# EAGLE board BMS (EAGLE 7.5.0), part 1 of 2
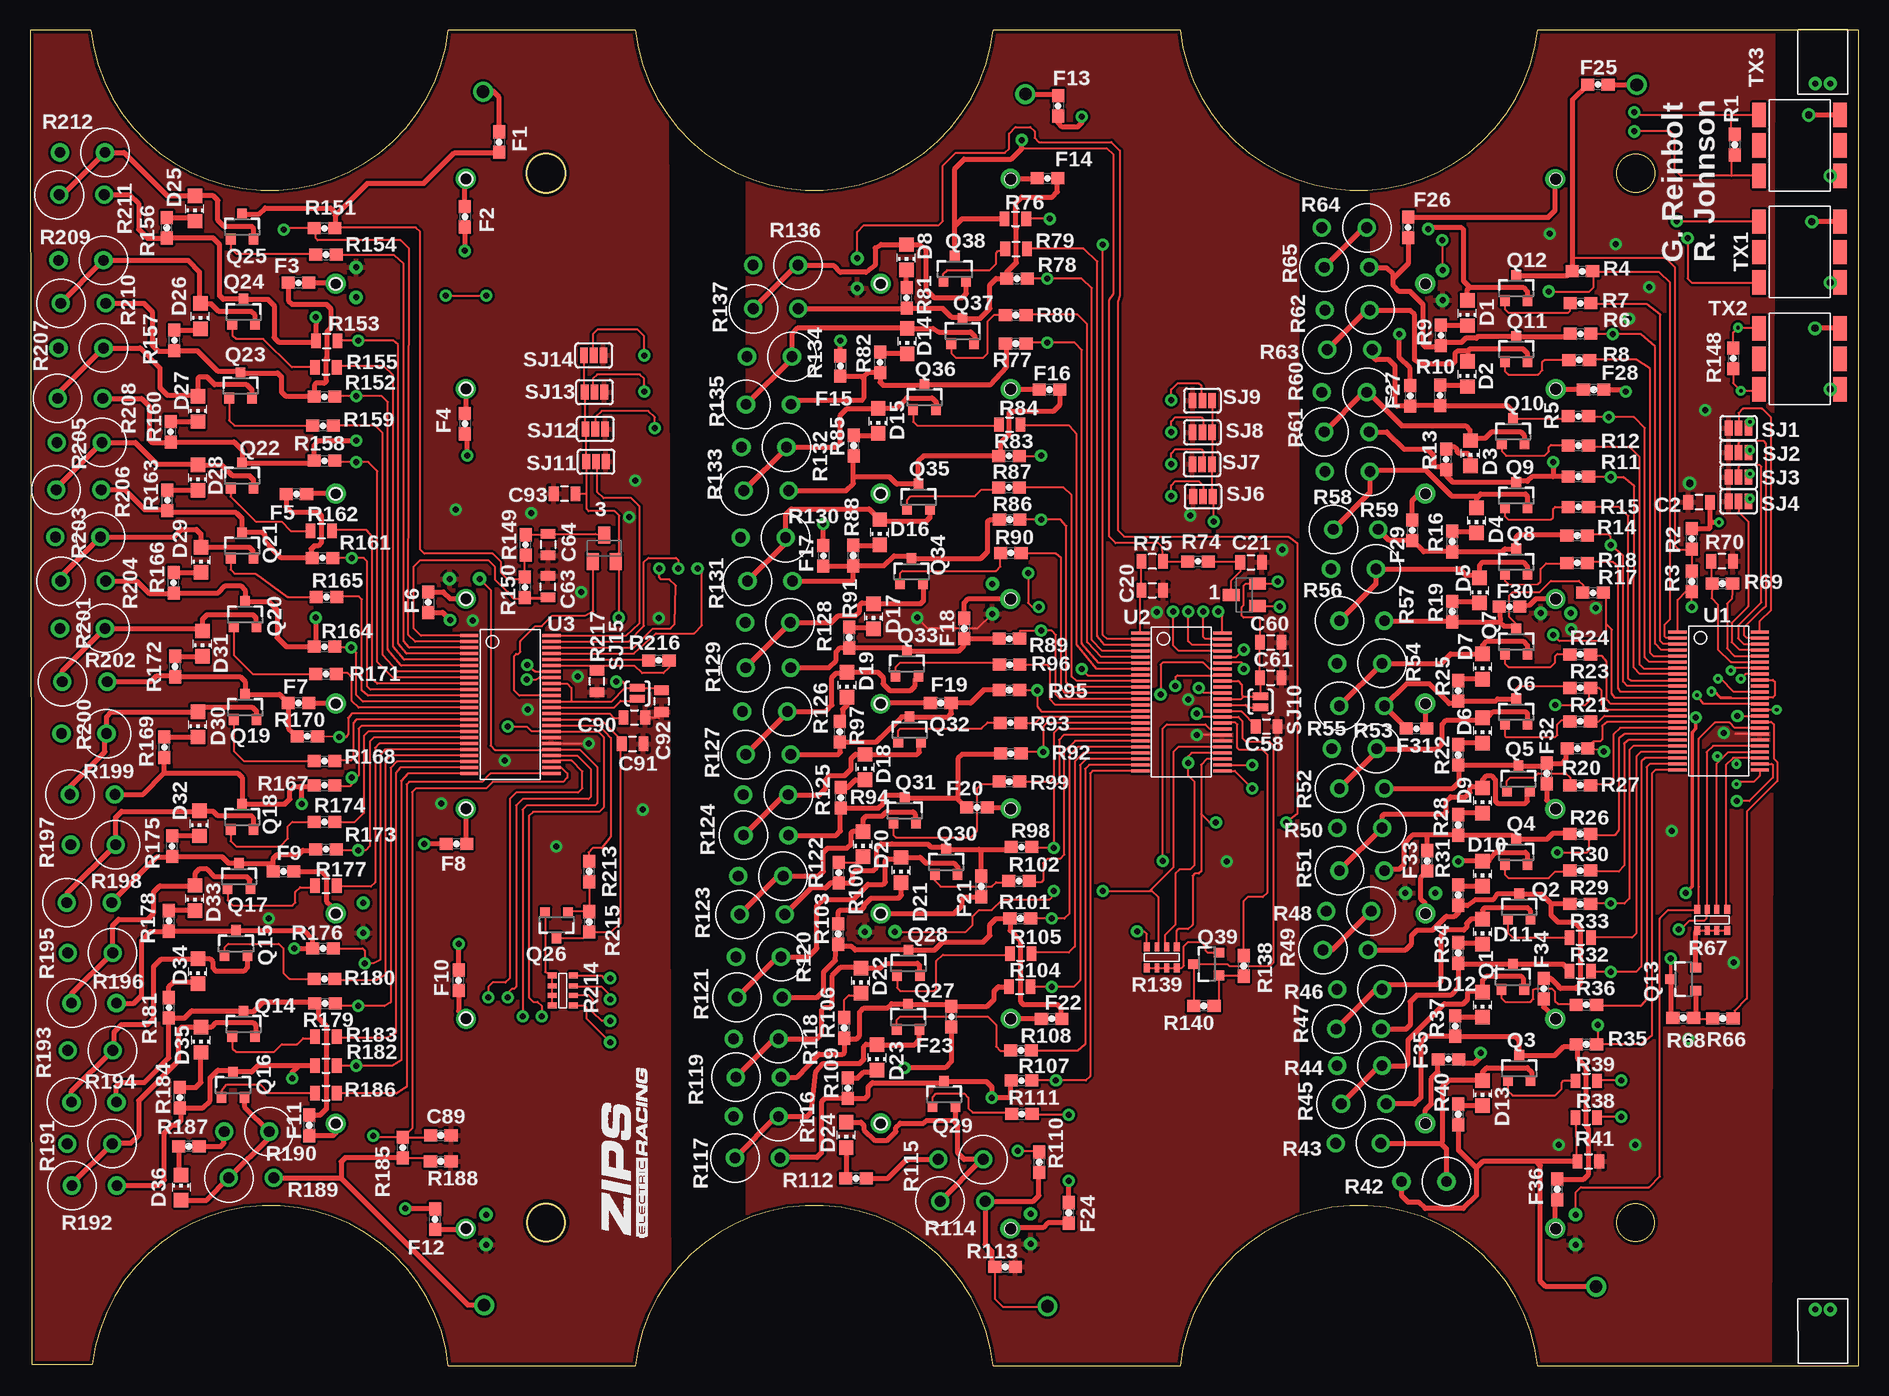
[diagram p0: board, top side]
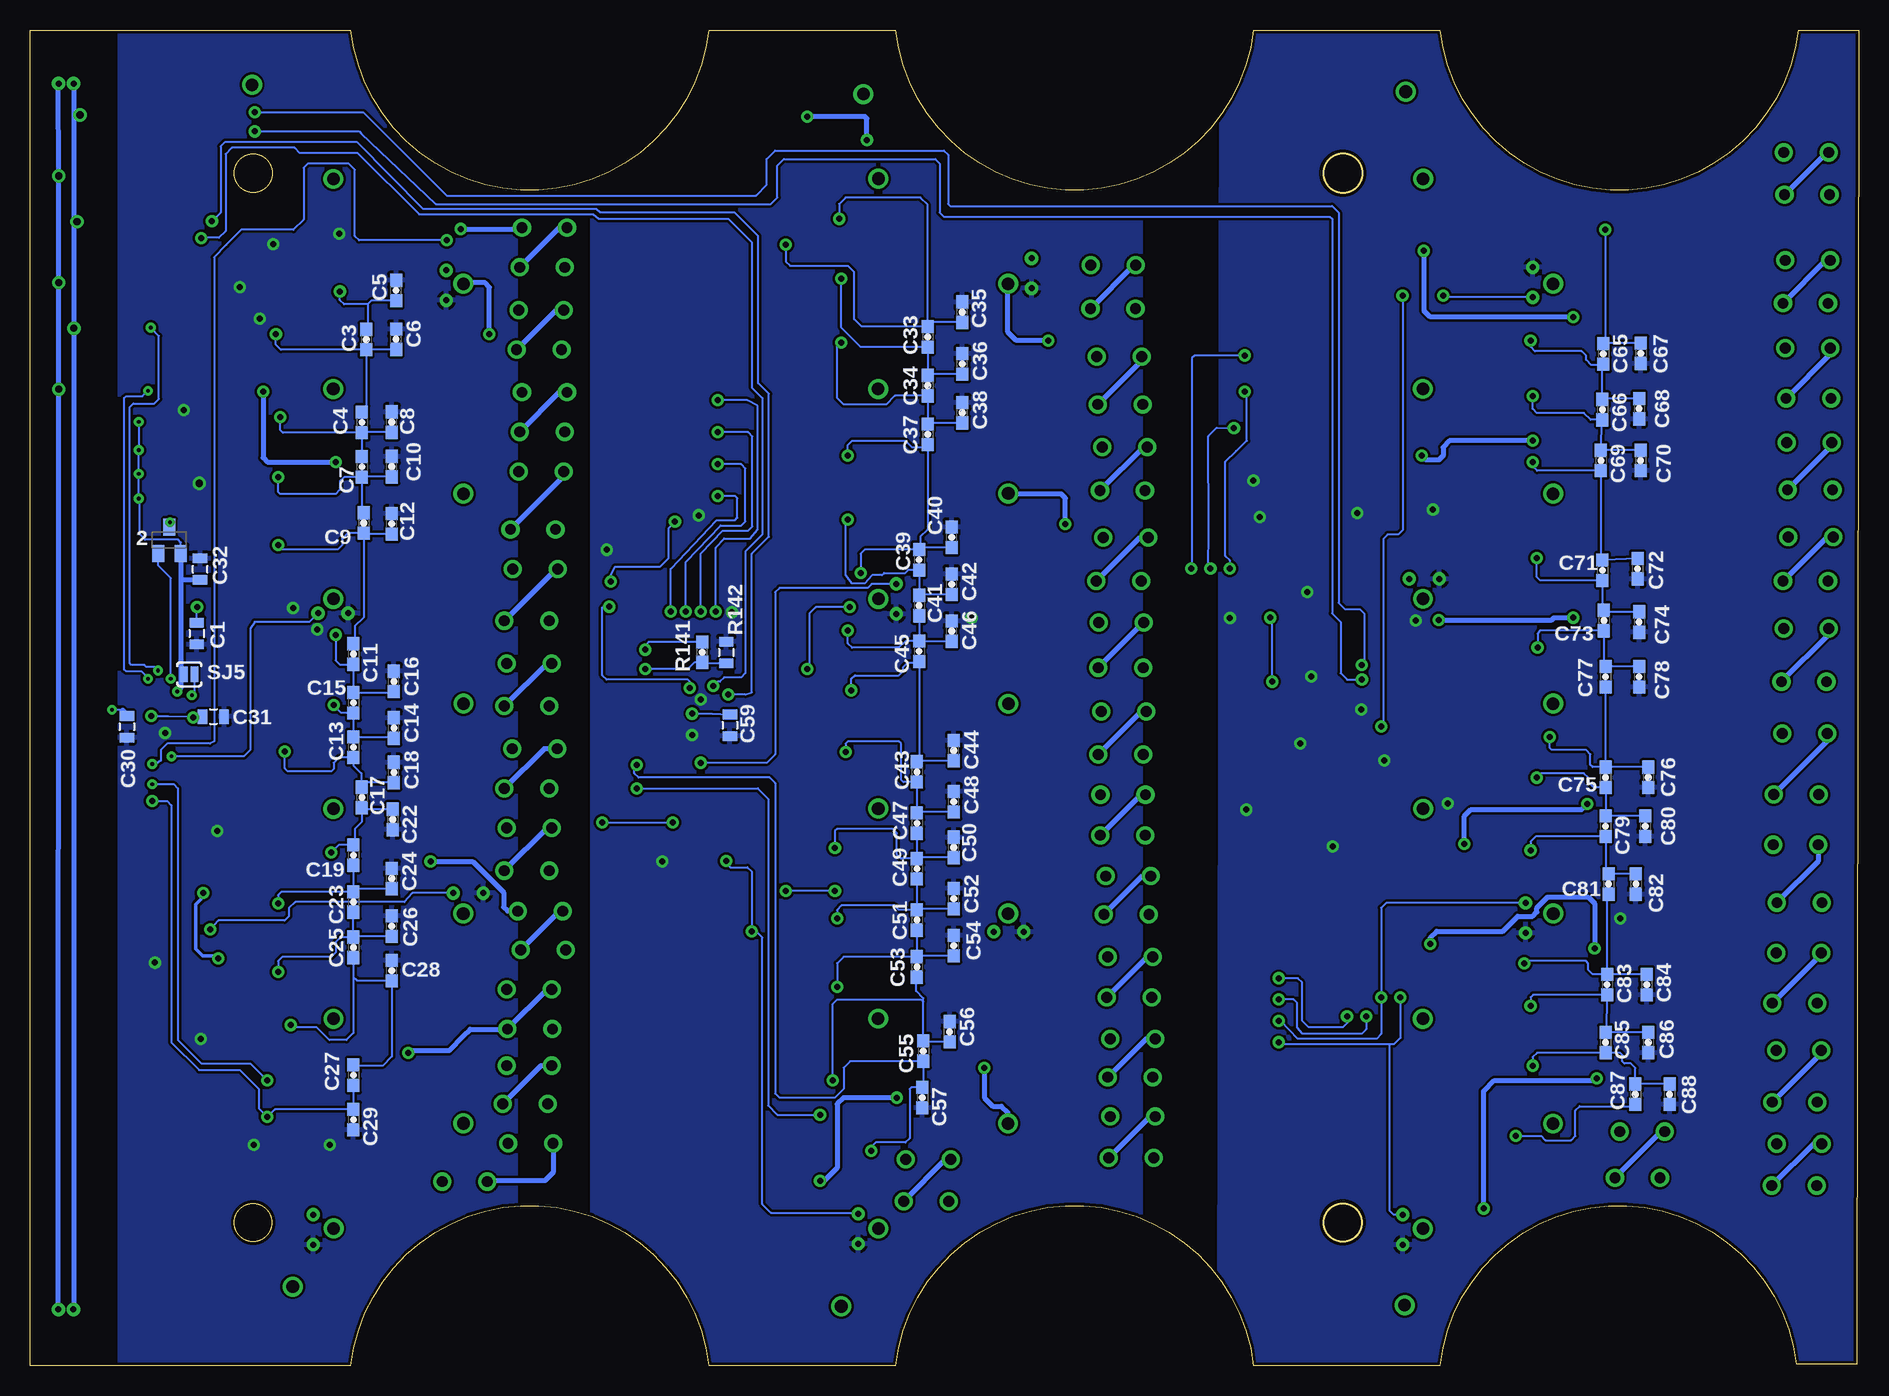
[diagram p1: board, bottom side, seen from below]

Size 152.4 x 111.35 mm. Coordinates in mm from the lower left corner, seen from the top.
Outline: 95.83,111.35 arc167 125.65,111.35 152.4,111.35 152.4,0 125.65,0 arc167 95.83,0 80.26,0 arc167 50.44,0 34.87,0 arc167 5.21,0.13 0.15,0.13 0,111.35 5.05,111.35 arc167 34.87,111.35 50.44,111.35 arc167 80.26,111.35 95.83,111.35
Outline: circle at 133.81,99.42 radius 1.6
Outline: circle at 133.81,11.94 radius 1.57
Outline: circle at 43,11.94 radius 1.57
Outline: circle at 43,99.42 radius 1.6
Copper layers (1*16): Top 0.035mm / dielectric 1.5mm / Bottom 0.035mm
Design rules "SparkFun *": minimum track width 7mil, minimum drill 12mil, track to track 8mil, track to pad 8mil, pad to pad 8mil, via to via 8mil, smd to smd 8mil, copper to edge 10mil, drill to drill 8mil, minimum pad ring 12mil, minimum via ring 10mil, stop-mask expansion 4mil, vias tented up to drill 25mil, thermal gap 10mil

## Footprints (pad centres in the part's own frame; a part is rotated, then mirrored left to right if it is on the bottom)
SOT23-BEC = smd 1 x 1.4: B -0.95,-1.1; C 0,1.1; E 0.95,-1.1
0805 = smd 0.8 x 1.2: 1 -0.9,0; 2 0.9,0
0603 = smd 1.1 x 1: 1 -0.85,0; 2 0.85,0
CHIP_LED0805 = smd 1.2 x 1.2: A 0,-1.05; C 0,1.05
DF13-2P = drill 0.5: 1 -0.625,0; 2 0.625,0
SOT23 = smd 0.8 x 0.9: 1 -0.95,-1; 2 0.95,-1; 3 0,1.1
RR02J16RTB = drill 0.9: P$1 -3.75,0; P$2 0,0
MNR14 = smd 0.5 x 0.75: 1 -1.25,-0.9; 4 1.25,-0.9; 5 1.25,0.85; 8 -1.25,0.85 | smd 0.4 x 0.75: 2 -0.4,-0.9; 3 0.4,-0.9; 6 0.4,0.85; 7 -0.4,0.85
NTC-NXRT15XH103FA5B = drill 0.5: P$1 0,0; P$2 2.5,0
PAD-JUMPER-3-NO_YES_SILK = smd 0.635 x 1.27: 1 -0.813,0; 2 0,0; 3 0.813,0
PAD-JUMPER-2-NO_YES_SILK = smd 0.635 x 1.27: 1 -0.45,0; 2 0.45,0
PE-68386NLT = smd 1.143 x 2.032: 1 -3.378,2.54; 2 -3.378,0; 3 -3.378,-2.54; 4 3.353,-2.54; 5 3.353,0; 6 3.353,2.54
SSOP-48 = smd 0.25 x 1.524: 1 -5.75,-3.421; 2 -5.25,-3.421; 3 -4.75,-3.421; 4 -4.25,-3.421; 5 -3.75,-3.421; 6 -3.25,-3.421; 7 -2.75,-3.421; 8 -2.25,-3.421; 9 -1.75,-3.421; 10 -1.25,-3.421; 11 -0.75,-3.421; 12 -0.25,-3.421; 13 0.25,-3.421; 14 0.75,-3.421; 15 1.25,-3.421; 16 1.75,-3.421; 17 2.25,-3.421; 18 2.75,-3.421; 19 3.25,-3.421; 20 3.75,-3.421; 21 4.25,-3.421; 22 4.75,-3.421; 23 5.25,-3.421; 24 5.75,-3.421; 25 5.75,3.421; 26 5.25,3.421; 27 4.75,3.421; 28 4.25,3.421; 29 3.75,3.421; 30 3.25,3.421; 31 2.75,3.421; 32 2.25,3.421; 33 1.75,3.421; 34 1.25,3.421; 35 0.75,3.421; 36 0.25,3.421; 37 -0.25,3.421; 38 -0.75,3.421; 39 -1.25,3.421; 40 -1.75,3.421; 41 -2.25,3.421; 42 -2.75,3.421; 43 -3.25,3.421; 44 -3.75,3.421; 45 -4.25,3.421; 46 -4.75,3.421; 47 -5.25,3.421; 48 -5.75,3.421
POGOPIN = drill 1.05: 1 0,0

## Placement (x,y rotation side)
1  BCV71SMD  [SOT23-BEC]  101.19,64.26 90 top
2  BCV71SMD  [SOT23-BEC]  140.78,68.82 0 bottom
3  BCV71SMD  [SOT23-BEC]  47.85,68.15 0 top
C1  0.1UF  [0805]  138.51,61.04 270 bottom
C2  0.1UF  [0805]  139.09,71.98 180 top
C3  10NF  [0603]  124.38,85.55 270 bottom
C4  10NF  [0603]  124.74,78.64 270 bottom
C5  DNP  [0603]  121.89,89.64 90 bottom
C6  DNP  [0603]  121.89,85.57 90 bottom
C7  10NF  [0603]  124.74,74.93 270 bottom
C8  DNP  [0603]  122.25,78.66 90 bottom
C9  10NF  [0603]  124.59,70.26 270 bottom
C10  DNP  [0603]  122.25,74.96 90 bottom
C11  10NF  [0603]  125.45,59.33 270 bottom
C12  DNP  [0603]  122.25,70.18 90 bottom
C13  10NF  [0603]  125.45,51.56 270 bottom
C14  DNP  [0603]  122.07,53.16 90 bottom
C15  10NF  [0603]  125.45,55.27 270 bottom
C16  DNP  [0603]  122.07,57.05 90 bottom
C17  10NF  [0603]  124.74,47.37 270 bottom
C18  DNP  [0603]  122.07,49.45 90 bottom
C19  10NF  [0603]  125.45,42.57 270 bottom
C20  0.1UF  [0805]  93.52,64.64 0 top
C21  0.1UF  [0805]  101.75,66.98 0 top
C22  DNP  [0603]  122.17,45.54 270 bottom
C23  10NF  [0603]  125.45,38.66 270 bottom
C24  DNP  [0603]  122.25,40.61 90 bottom
C25  10NF  [0603]  125.45,34.87 270 bottom
C26  DNP  [0603]  122.25,36.65 90 bottom
C27  10NF  [0603]  125.45,24.23 270 bottom
C28  DNP  [0603]  122.25,32.94 90 bottom
C29  10NF  [0603]  125.45,20.52 270 bottom
C30  1UF  [0805]  144.33,53.26 270 bottom
C31  1UF  [0805]  137.12,54.11 0 bottom
C32  1UF  [0805]  138.22,66.4 90 bottom
C33  10NF  [0603]  77.6,85.78 270 bottom
C34  10NF  [0603]  77.6,81.71 270 bottom
C35  DNP  [0603]  74.7,87.83 90 bottom
C36  DNP  [0603]  74.7,83.52 90 bottom
C37  10NF  [0603]  77.6,77.65 270 bottom
C38  DNP  [0603]  74.7,79.45 90 bottom
C39  10NF  [0603]  78.31,67.18 270 bottom
C40  DNP  [0603]  75.59,69.06 90 bottom
C41  10NF  [0603]  78.31,63.37 270 bottom
C42  DNP  [0603]  75.59,65.15 90 bottom
C43  10NF  [0603]  78.49,49.5 270 bottom
C44  DNP  [0603]  75.41,51.28 90 bottom
C45  10NF  [0603]  78.31,59.56 270 bottom
C46  DNP  [0603]  75.59,61.24 90 bottom
C47  10NF  [0603]  78.49,45.24 270 bottom
C48  DNP  [0603]  75.41,47.02 90 bottom
C49  10NF  [0603]  78.49,41.43 270 bottom
C50  DNP  [0603]  75.41,43.21 90 bottom
C51  10NF  [0603]  78.49,37.16 270 bottom
C52  DNP  [0603]  75.41,38.94 90 bottom
C53  10NF  [0603]  78.49,33.25 270 bottom
C54  DNP  [0603]  75.41,35.03 90 bottom
C55  10NF  [0603]  77.95,26.24 270 bottom
C56  DNP  [0603]  75.77,27.84 90 bottom
C57  10NF  [0603]  78.04,22.35 270 bottom
C58  1UF  [0805]  103.05,53.29 0 top
C59  1UF  [0805]  94.08,53.39 270 bottom
C60  1UF  [0805]  103.4,60.3 0 top
C61  1UF  [0805]  103.4,57.36 0 top
C63  0.1UF  [0805]  43.15,64.95 90 top
C64  0.1UF  [0805]  43.18,68.45 270 top
C65  10NF  [0603]  21.29,84.35 270 bottom
C66  10NF  [0603]  21.36,79.71 270 bottom
C67  DNP  [0603]  18.16,84.4 270 bottom
C68  DNP  [0603]  18.31,79.78 270 bottom
C69  10NF  [0603]  21.49,75.46 270 bottom
C70  DNP  [0603]  18.19,75.46 270 bottom
C71  10NF  [0603]  21.36,66.32 270 bottom
C72  DNP  [0603]  18.44,66.45 270 bottom
C73  10NF  [0603]  21.23,62.13 270 bottom
C74  DNP  [0603]  18.31,62 270 bottom
C75  10NF  [0603]  21.11,49.05 270 bottom
C76  DNP  [0603]  17.55,49.05 270 bottom
C77  10NF  [0603]  21.11,57.43 270 bottom
C78  DNP  [0603]  18.31,57.43 270 bottom
C79  10NF  [0603]  21.11,44.98 270 bottom
C80  DNP  [0603]  17.81,44.98 270 bottom
C81  10NF  [0603]  20.85,40.16 270 bottom
C82  DNP  [0603]  18.57,40.16 270 bottom
C83  10NF  [0603]  20.98,31.78 270 bottom
C84  DNP  [0603]  17.68,31.78 270 bottom
C85  10NF  [0603]  21.11,26.95 270 bottom
C86  DNP  [0603]  17.55,26.95 270 bottom
C87  10NF  [0603]  18.62,22.63 270 bottom
C88  DNP  [0603]  15.77,22.63 270 bottom
C89  10NF  [0603]  34.23,19.21 0 top
C90  1UF  [0805]  50.37,54.04 0 top
C91  1UF  [0805]  50.22,51.84 0 top
C92  1UF  [0805]  52.63,55.4 270 top
C93  1UF  [0805]  44.54,72.7 180 top
D1  LED_RED  [CHIP_LED0805]  119.79,87.76 180 top
D2  LED_RED  [CHIP_LED0805]  119.79,82.68 180 top
D3  LED_RED  [CHIP_LED0805]  120.04,76.07 180 top
D4  LED_RED  [CHIP_LED0805]  120.55,70.48 180 top
D5  LED_RED  [CHIP_LED0805]  120.8,64.64 180 top
D6  LED_RED  [CHIP_LED0805]  121.06,52.96 180 top
D7  LED_RED  [CHIP_LED0805]  121.06,58.29 180 top
D8  LED_RED  [CHIP_LED0805]  73.03,92.41 180 top
D9  LED_RED  [CHIP_LED0805]  121.06,47.12 180 top
D10  LED_RED  [CHIP_LED0805]  121.06,41.02 180 top
D11  LED_RED  [CHIP_LED0805]  121.06,36.2 180 top
D12  LED_RED  [CHIP_LED0805]  121.06,30.1 180 top
D13  LED_RED  [CHIP_LED0805]  121.06,22.73 180 top
D14  LED_RED  [CHIP_LED0805]  73.1,85.42 180 top
D15  LED_RED  [CHIP_LED0805]  70.69,78.77 180 top
D16  LED_RED  [CHIP_LED0805]  70.82,69.49 180 top
D17  LED_RED  [CHIP_LED0805]  70.31,62.48 180 top
D18  LED_RED  [CHIP_LED0805]  69.6,49.91 180 top
D19  LED_RED  [CHIP_LED0805]  68.1,56.77 180 top
D20  LED_RED  [CHIP_LED0805]  69.42,43.48 180 top
D21  LED_RED  [CHIP_LED0805]  72.59,41.33 180 top
D22  LED_RED  [CHIP_LED0805]  69.24,32.11 180 top
D23  LED_RED  [CHIP_LED0805]  70.59,25.7 180 top
D24  LED_RED  [CHIP_LED0805]  68.02,19.25 180 top
D25  LED_RED  [CHIP_LED0805]  13.74,96.47 180 top
D26  LED_RED  [CHIP_LED0805]  14.2,87.5 180 top
D27  LED_RED  [CHIP_LED0805]  14,79.76 180 top
D28  LED_RED  [CHIP_LED0805]  14,74.04 180 top
D29  LED_RED  [CHIP_LED0805]  14.25,67.18 180 top
D30  LED_RED  [CHIP_LED0805]  14,53.47 180 top
D31  LED_RED  [CHIP_LED0805]  14.38,60.2 180 top
D32  LED_RED  [CHIP_LED0805]  14.12,45.21 180 top
D33  LED_RED  [CHIP_LED0805]  13.74,38.99 180 top
D34  LED_RED  [CHIP_LED0805]  14,32.89 180 top
D35  LED_RED  [CHIP_LED0805]  14.25,27.18 180 top
D36  LED_RED  [CHIP_LED0805]  12.6,14.86 0 top
F1  FUSE_750MA_63V_0603  [0603]  39.09,102.01 270 top
F2  FUSE_750MA_63V_0603  [0603]  36.25,95.78 270 top
F3  FUSE_750MA_63V_0603  [0603]  22.38,90.27 180 top
F4  FUSE_750MA_63V_0603  [0603]  36.25,78.54 270 top
F5  FUSE_750MA_63V_0603  [0603]  22.2,72.67 180 top
F6  FUSE_750MA_63V_0603  [0603]  33.2,63.65 270 top
F7  FUSE_750MA_63V_0603  [0603]  22.38,55.25 180 top
F8  FUSE_750MA_63V_0603  [0603]  35.53,43.51 180 top
F9  FUSE_750MA_63V_0603  [0603]  21.13,41.2 180 top
F10  FUSE_750MA_63V_0603  [0603]  35.71,32.13 90 top
F11  FUSE_750MA_63V_0603  [0603]  23.27,20.04 90 top
F12  FUSE_750MA_63V_0603  [0603]  33.76,12.22 90 top
F13  FUSE_750MA_63V_0603  [0603]  85.67,105.03 270 top
F14  FUSE_750MA_63V_0603  [0603]  84.79,98.98 0 top
F15  FUSE_750MA_63V_0603  [0603]  67.54,83.34 270 top
F16  FUSE_750MA_63V_0603  [0603]  84.96,81.38 0 top
F17  FUSE_750MA_63V_0603  [0603]  66.12,67.51 270 top
F18  FUSE_750MA_63V_0603  [0603]  77.85,61.47 270 top
F19  FUSE_750MA_63V_0603  [0603]  75.9,55.25 0 top
F20  FUSE_750MA_63V_0603  [0603]  78.92,46.53 180 top
F21  FUSE_750MA_63V_0603  [0603]  79.27,39.95 90 top
F22  FUSE_750MA_63V_0603  [0603]  85.14,28.93 0 top
F23  FUSE_750MA_63V_0603  [0603]  76.78,29.11 90 top
F24  FUSE_750MA_63V_0603  [0603]  86.56,12.75 90 top
F25  FUSE_750MA_63V_0603  [0603]  130.66,106.81 180 top
F26  FUSE_750MA_63V_0603  [0603]  114.83,94.89 270 top
F27  FUSE_750MA_63V_0603  [0603]  115.01,80.85 270 top
F28  FUSE_750MA_63V_0603  [0603]  130.3,81.38 0 top
F29  FUSE_750MA_63V_0603  [0603]  115.19,69.65 270 top
F30  FUSE_750MA_63V_0603  [0603]  123.29,63.27 180 top
F31  FUSE_750MA_63V_0603  [0603]  115.54,53.11 180 top
F32  FUSE_750MA_63V_0603  [0603]  126.39,49.38 90 top
F33  FUSE_750MA_63V_0603  [0603]  116.43,42.09 90 top
F34  FUSE_750MA_63V_0603  [0603]  126.14,31.45 90 top
F35  FUSE_750MA_63V_0603  [0603]  118.21,25.55 0 top
F36  FUSE_750MA_63V_0603  [0603]  127.28,14.71 90 top
J1  M2_DF13-2P  [DF13-2P]  149.4,4.7 180 top
J2  M2_DF13-2P  [DF13-2P]  149.4,106.88 0 top
Q1  BSS308PE  [SOT23]  123.57,32.39 0 top
Q2  BSS308PE  [SOT23]  124.1,38.23 0 top
Q3  BSS308PE  [SOT23]  124.1,24.77 0 top
Q4  BSS308PE  [SOT23]  123.85,42.8 0 top
Q5  BSS308PE  [SOT23]  124.03,48.9 0 top
Q6  BSS308PE  [SOT23]  123.85,54.48 0 top
Q7  BSS308PE  [SOT23]  123.85,60.33 0 top
Q8  BSS308PE  [SOT23]  123.85,66.98 0 top
Q9  BSS308PE  [SOT23]  123.85,72.52 0 top
Q10  BSS308PE  [SOT23]  123.6,77.85 0 top
Q11  BSS308PE  [SOT23]  123.85,84.71 0 top
Q12  BSS308PE  [SOT23]  123.85,89.79 0 top
Q13  BSS308PE  [SOT23]  137.81,32.23 90 top
Q14  BSS308PE  [SOT23]  17.81,28.45 0 top
Q15  BSS308PE  [SOT23]  17.17,35.18 0 top
Q16  BSS308PE  [SOT23]  16.92,23.37 0 top
Q17  BSS308PE  [SOT23]  17.42,40.77 0 top
Q18  BSS308PE  [SOT23]  17.68,45.72 0 top
Q19  BSS308PE  [SOT23]  17.93,54.86 0 top
Q20  BSS308PE  [SOT23]  17.93,62.61 0 top
Q21  BSS308PE  [SOT23]  17.68,68.33 0 top
Q22  BSS308PE  [SOT23]  17.68,74.17 0 top
Q23  BSS308PE  [SOT23]  17.55,81.66 0 top
Q24  BSS308PE  [SOT23]  17.81,87.81 0 top
Q25  BSS308PE  [SOT23]  17.68,94.92 0 top
Q26  BSS308PE  [SOT23]  43.88,36.77 180 top
Q27  BSS308PE  [SOT23]  73.18,29.03 0 top
Q28  BSS308PE  [SOT23]  73.2,33.55 0 top
Q29  BSS308PE  [SOT23]  76.17,22.61 0 top
Q30  BSS308PE  [SOT23]  76.35,41.96 0 top
Q31  BSS308PE  [SOT23]  72.9,46.25 0 top
Q32  BSS308PE  [SOT23]  73.3,52.98 0 top
Q33  BSS308PE  [SOT23]  73.08,58.5 0 top
Q34  BSS308PE  [SOT23]  73.46,66.19 0 top
Q35  BSS308PE  [SOT23]  74.04,72.39 0 top
Q36  BSS308PE  [SOT23]  74.55,80.7 0 top
Q37  BSS308PE  [SOT23]  77.72,86.21 0 top
Q38  BSS308PE  [SOT23]  77.06,91.39 0 top
Q39  BSS308PE  [SOT23]  98.08,33.49 90 top
R1  DNP  [0603]  142.07,101.79 270 top
R2  100  [0603]  138.48,68.94 90 top
R3  100  [0603]  138.48,65.38 270 top
R4  100  [0603]  129.36,91.24 0 top
R5  100  [0603]  129.03,79.15 0 top
R6  100  [0603]  129.21,86.03 0 top
R7  3.3K  [0603]  129.21,88.57 0 top
R8  3.3K  [0603]  129.11,83.85 0 top
R9  475  [0603]  117.58,85.9 90 top
R10  475  [0603]  117.5,80.9 90 top
R11  100  [0603]  129.03,74.12 0 top
R12  3.3K  [0603]  129.03,76.71 0 top
R13  475  [0603]  118.01,75.56 90 top
R14  100  [0603]  128.93,69.21 0 top
R15  3.3K  [0603]  129.03,71.6 0 top
R16  475  [0603]  118.52,68.71 90 top
R17  100  [0603]  130.25,64.44 0 top
R18  3.3K  [0603]  128.93,66.93 0 top
R19  475  [0603]  118.52,62.87 90 top
R20  100  [0603]  128.96,51.46 0 top
R21  3.3K  [0603]  129.18,53.72 0 top
R22  475  [0603]  119.02,50.93 90 top
R23  100  [0603]  129.18,56.52 0 top
R24  3.3K  [0603]  129.18,59.31 0 top
R25  475  [0603]  119.02,56.26 90 top
R26  100  [0603]  129.18,44.32 0 top
R27  3.3K  [0603]  129.18,48.39 0 top
R28  475  [0603]  119.02,45.09 90 top
R29  100  [0603]  129.18,38.48 0 top
R30  3.3K  [0603]  129.18,41.28 0 top
R31  475  [0603]  119.02,39.24 90 top
R32  100  [0805]  129.18,32.89 0 top
R33  3.3K  [0805]  129.18,35.69 0 top
R34  475  [0603]  119.02,34.42 90 top
R35  100  [0603]  129.69,26.8 0 top
R36  3.3K  [0603]  129.69,30.1 0 top
R37  475  [0603]  118.77,28.32 90 top
R38  100  [0805]  129.69,20.7 0 top
R39  3.3K  [0805]  129.69,23.75 0 top
R40  475  [0603]  119.02,20.95 90 top
R41  0  [0805]  129.87,17.04 0 top
R42  16  [RR02J16RTB]  118.05,15.35 0 top
R43  16  [RR02J16RTB]  112.56,18.54 0 top
R44  16  [RR02J16RTB]  112.67,25.02 0 top
R45  16  [RR02J16RTB]  109.26,21.83 180 top
R46  16  [RR02J16RTB]  112.67,31.37 0 top
R47  16  [RR02J16RTB]  108.86,28.07 180 top
R48  16  [RR02J16RTB]  111.76,37.9 0 top
R49  16  [RR02J16RTB]  107.75,34.67 180 top
R50  16  [RR02J16RTB]  112.67,44.83 0 top
R51  16  [RR02J16RTB]  109.12,41.28 180 top
R52  16  [RR02J16RTB]  109.12,48.13 180 top
R53  16  [RR02J16RTB]  112.22,51.44 0 top
R54  16  [RR02J16RTB]  112.67,58.55 0 top
R55  16  [RR02J16RTB]  109.12,54.99 180 top
R56  16  [RR02J16RTB]  112.17,66.42 0 top
R57  16  [RR02J16RTB]  109.12,62.1 180 top
R58  16  [RR02J16RTB]  111.66,74.55 0 top
R59  16  [RR02J16RTB]  108.61,69.72 180 top
R60  16  [RR02J16RTB]  111.4,81.15 0 top
R61  16  [RR02J16RTB]  107.85,77.85 180 top
R62  16  [RR02J16RTB]  111.66,88.01 0 top
R63  16  [RR02J16RTB]  108.1,84.71 180 top
R64  16  [RR02J16RTB]  111.4,94.87 0 top
R65  16  [RR02J16RTB]  107.85,91.57 180 top
R66  1K  [0603]  141.07,28.96 0 top
R67  10K  [MNR14]  140.17,37.13 180 top
R68  100K  [0603]  137.77,28.99 180 top
R69  1.2K  [0603]  141.03,65.21 0 top
R70  787  [0805]  141.01,67.07 180 top
R71  10K-NTC  [NTC-NXRT15XH103FA5B]  117.71,88.82 90 top
R72  10K-NTC  [NTC-NXRT15XH103FA5B]  125.89,62.74 0 top
R73  10K-NTC  [NTC-NXRT15XH103FA5B]  114.62,39.4 0 top
R74  100  [0603]  97.33,67.06 0 top
R75  100  [0805]  93.52,67.06 180 top
R76  100  [0805]  82.12,95.61 0 top
R77  100  [0603]  82.14,85.22 0 top
R78  100  [0603]  82.25,90.63 0 top
R79  3.3K  [0805]  82.17,93.09 0 top
R80  3.3K  [0603]  82.14,87.58 0 top
R81  475  [0603]  73.05,89.03 90 top
R82  475  [0603]  70.84,83.64 90 top
R83  100  [0603]  81.58,75.84 0 top
R84  3.3K  [0805]  81.64,78.46 0 top
R85  475  [0603]  68.66,76.71 90 top
R86  100  [0603]  81.64,70.54 0 top
R87  3.3K  [0603]  81.58,73.23 0 top
R88  475  [0603]  68.61,67.54 90 top
R89  100  [0603]  81.61,60.6 0 top
R90  3.3K  [0603]  81.74,67.77 0 top
R91  475  [0603]  68.28,60.71 90 top
R92  100  [0603]  81.74,51.03 0 top
R93  3.3K  [0603]  81.71,53.59 0 top
R94  475  [0603]  67.56,47.35 90 top
R95  100  [0603]  81.61,56.34 0 top
R96  3.3K  [0603]  81.64,58.45 0 top
R97  475  [0603]  67.49,52.86 90 top
R98  100  [0603]  82.63,43.23 0 top
R99  3.3K  [0603]  81.61,48.69 0 top
R100  475  [0603]  67.39,41.1 90 top
R101  100  [0603]  82.52,37.29 0 top
R102  3.3K  [0603]  82.42,40.41 0 top
R103  475  [0603]  67.36,35.99 90 top
R104  100  [0805]  82.47,31.6 0 top
R105  3.3K  [0805]  82.55,34.37 0 top
R106  475  [0603]  67.84,28.17 90 top
R107  100  [0603]  82.63,23.77 0 top
R108  3.3K  [0603]  82.58,26.29 0 top
R109  475  [0603]  68.15,23.14 90 top
R110  100  [0603]  84.1,16.97 90 top
R111  3.3K  [0603]  82.65,20.98 0 top
R112  475  [0603]  68.83,15.62 180 top
R113  0  [0603]  81.26,8.25 0 top
R114  16  [RR02J16RTB]  75.84,13.72 180 top
R115  16  [RR02J16RTB]  79.43,17.2 0 top
R116  16  [RR02J16RTB]  62.38,20.78 0 top
R117  16  [RR02J16RTB]  58.75,17.32 180 top
R118  16  [RR02J16RTB]  62.38,27.25 0 top
R119  16  [RR02J16RTB]  58.83,24.05 180 top
R120  16  [RR02J16RTB]  62.59,34.09 0 top
R121  16  [RR02J16RTB]  58.93,30.71 180 top
R122  16  [RR02J16RTB]  62.76,40.82 0 top
R123  16  [RR02J16RTB]  59.16,37.62 180 top
R124  16  [RR02J16RTB]  59.46,44.22 180 top
R125  16  [RR02J16RTB]  63.2,47.6 0 top
R126  16  [RR02J16RTB]  63.12,54.53 0 top
R127  16  [RR02J16RTB]  59.64,50.95 180 top
R128  16  [RR02J16RTB]  63.35,61.95 0 top
R129  16  [RR02J16RTB]  59.64,58.19 180 top
R130  16  [RR02J16RTB]  62.97,69.04 0 top
R131  16  [RR02J16RTB]  59.79,65.41 180 top
R132  16  [RR02J16RTB]  63.04,76.58 0 top
R133  16  [RR02J16RTB]  59.49,72.95 180 top
R134  16  [RR02J16RTB]  63.5,84.12 0 top
R135  16  [RR02J16RTB]  59.66,80.14 180 top
R136  16  [RR02J16RTB]  64.01,91.74 0 top
R137  16  [RR02J16RTB]  60.27,88.11 180 top
R138  1K  [0603]  101.14,33.33 90 top
R139  10K  [MNR14]  94.32,34.02 180 top
R140  100K  [0603]  97.82,30 180 top
R141  1.2K  [0603]  96.37,59.49 90 bottom
R142  787  [0805]  94.38,59.45 270 bottom
R143  10K-NTC  [NTC-NXRT15XH103FA5B]  68.93,89.82 90 top
R144  10K-NTC  [NTC-NXRT15XH103FA5B]  80.2,62.68 90 top
R145  10K-NTC  [NTC-NXRT15XH103FA5B]  69.58,36.18 0 top
R146  10K-NTC  [NTC-NXRT15XH103FA5B]  83.38,10.17 90 top
R147  10K-NTC  [NTC-NXRT15XH103FA5B]  128.8,10.1 90 top
R148  DNP  [0603]  141.93,83.99 270 top
R149  100  [0603]  41.3,68.43 90 top
R150  100  [0603]  41.25,64.9 270 top
R151  100  [0603]  24.54,94.82 180 top
R152  100  [0603]  24.54,80.77 0 top
R153  100  [0805]  24.73,85.42 0 top
R154  3.3K  [0603]  24.66,92.63 0 top
R155  3.3K  [0805]  24.66,83.24 0 top
R156  475  [0603]  11.4,94.87 90 top
R157  475  [0603]  12.04,85.47 90 top
R158  100  [0603]  24.54,75.44 0 top
R159  3.3K  [0603]  24.41,78.36 0 top
R160  475  [0603]  11.71,77.85 90 top
R161  100  [0603]  24.38,67.35 0 top
R162  3.3K  [0805]  24.28,69.6 0 top
R163  475  [0603]  11.46,72.14 90 top
R164  100  [0603]  24.54,59.94 0 top
R165  3.3K  [0603]  24.71,64.08 0 top
R166  475  [0603]  11.96,65.28 90 top
R167  100  [0603]  24.54,48.39 0 top
R168  3.3K  [0603]  24.54,50.42 0 top
R169  475  [0603]  11.2,51.56 90 top
R170  100  [0603]  23.11,52.48 0 top
R171  3.3K  [0603]  24.66,57.66 0 top
R172  475  [0603]  12.09,58.29 90 top
R173  100  [0603]  24.66,43.05 0 top
R174  3.3K  [0603]  24.54,45.34 0 top
R175  475  [0603]  11.84,43.31 90 top
R176  100  [0603]  24.41,34.8 0 top
R177  3.3K  [0805]  24.66,40.01 0 top
R178  475  [0603]  11.58,37.08 90 top
R179  100  [0603]  24.59,30.2 0 top
R180  3.3K  [0603]  24.54,32.26 0 top
R181  475  [0603]  11.58,29.84 90 top
R182  100  [0805]  24.66,25.02 0 top
R183  3.3K  [0805]  24.66,27.43 0 top
R184  475  [0603]  12.47,22.35 90 top
R185  100  [0603]  31.06,18.19 90 top
R186  3.3K  [0805]  24.66,22.73 0 top
R187  475  [0603]  13.23,18.29 180 top
R188  0  [0603]  34.23,17.04 0 top
R189  16  [RR02J16RTB]  16.57,15.66 180 top
R190  16  [RR02J16RTB]  19.93,19.52 0 top
R191  16  [RR02J16RTB]  6.85,18.51 0 top
R192  16  [RR02J16RTB]  3.49,15.02 180 top
R193  16  [RR02J16RTB]  6.88,26.29 0 top
R194  16  [RR02J16RTB]  3.45,21.97 180 top
R195  16  [RR02J16RTB]  6.88,34.42 0 top
R196  16  [RR02J16RTB]  3.45,30.23 180 top
R197  16  [RR02J16RTB]  7.14,43.43 0 top
R198  16  [RR02J16RTB]  3.07,38.61 180 top
R199  16  [RR02J16RTB]  3.33,47.62 180 top
R200  16  [RR02J16RTB]  6.38,52.71 0 top
R201  16  [RR02J16RTB]  6.25,61.47 0 top
R202  16  [RR02J16RTB]  2.69,57.02 180 top
R203  16  [RR02J16RTB]  5.87,69.09 0 top
R204  16  [RR02J16RTB]  2.57,65.41 180 top
R205  16  [RR02J16RTB]  5.99,76.96 0 top
R206  16  [RR02J16RTB]  2.18,73.02 180 top
R207  16  [RR02J16RTB]  6.12,84.84 0 top
R208  16  [RR02J16RTB]  2.31,80.64 180 top
R209  16  [RR02J16RTB]  6.12,92.15 0 top
R210  16  [RR02J16RTB]  2.57,88.57 180 top
R211  16  [RR02J16RTB]  2.44,97.61 180 top
R212  16  [RR02J16RTB]  6.25,101.14 0 top
R213  1K  [0603]  46.61,41.2 90 top
R214  10K  [MNR14]  44.38,31.27 90 top
R215  100K  [0603]  46.61,37.01 270 top
R216  1.2K  [0603]  52.4,58.81 180 top
R217  787  [0805]  47.25,57.06 90 top
R218  10K-NTC  [NTC-NXRT15XH103FA5B]  38,10.1 90 top
R219  10K-NTC  [NTC-NXRT15XH103FA5B]  27.77,36.08 90 top
R220  10K-NTC  [NTC-NXRT15XH103FA5B]  34.96,65.6 0 top
R221  10K-NTC  [NTC-NXRT15XH103FA5B]  27.17,91.56 270 top
SJ1  [PAD-JUMPER-3-NO_YES_SILK]  142.38,78.16 180 top
SJ2  [PAD-JUMPER-3-NO_YES_SILK]  142.38,76.13 180 top
SJ3  [PAD-JUMPER-3-NO_YES_SILK]  142.38,74.09 180 top
SJ4  [PAD-JUMPER-3-NO_YES_SILK]  142.38,72.06 180 top
SJ5  [PAD-JUMPER-2-NO_YES_SILK]  139.13,57.64 180 bottom
SJ6  [PAD-JUMPER-3-NO_YES_SILK]  97.75,72.46 180 top
SJ7  [PAD-JUMPER-3-NO_YES_SILK]  97.67,75.16 180 top
SJ8  [PAD-JUMPER-3-NO_YES_SILK]  97.7,77.8 180 top
SJ9  [PAD-JUMPER-3-NO_YES_SILK]  97.7,80.45 180 top
SJ10  [PAD-JUMPER-2-NO_YES_SILK]  102.55,55.36 90 top
SJ11  [PAD-JUMPER-3-NO_YES_SILK]  47.17,75.37 0 top
SJ12  [PAD-JUMPER-3-NO_YES_SILK]  47.11,78.09 0 top
SJ13  [PAD-JUMPER-3-NO_YES_SILK]  47.04,81.16 0 top
SJ14  [PAD-JUMPER-3-NO_YES_SILK]  46.98,84.24 0 top
SJ15  [PAD-JUMPER-2-NO_YES_SILK]  50.61,56.06 90 top
TX1  PE-68386NLT  [PE-68386NLT]  147.47,92.84 0 top
TX2  PE-68386NLT  [PE-68386NLT]  147.47,83.95 0 top
TX3  PE-68386NLT  [PE-68386NLT]  147.47,101.73 0 top
U1  LTC6804-2  [SSOP-48]  140.72,55.43 270 top
U2  LTC6804-2  [SSOP-48]  95.95,55.34 270 top
U3  LTC6804-2  [SSOP-48]  40.03,55.12 270 top
U$1  POGOPIN  [POGOPIN]  130.5,6.59 0 top
U$2  POGOPIN  [POGOPIN]  127.1,11.45 0 top
U$3  POGOPIN  [POGOPIN]  116.28,20.21 0 top
U$4  POGOPIN  [POGOPIN]  127.11,28.93 0 top
U$5  POGOPIN  [POGOPIN]  116.3,37.69 0 top
U$6  POGOPIN  [POGOPIN]  127.12,46.43 0 top
U$7  POGOPIN  [POGOPIN]  116.28,55.19 0 top
U$8  POGOPIN  [POGOPIN]  127.12,63.93 0 top
U$9  POGOPIN  [POGOPIN]  116.28,72.69 0 top
U$10  POGOPIN  [POGOPIN]  127.13,81.43 0 top
U$11  POGOPIN  [POGOPIN]  116.29,90.19 0 top
U$12  POGOPIN  [POGOPIN]  127.12,98.94 0 top
U$13  POGOPIN  [POGOPIN]  133.89,106.78 0 top
U$14  POGOPIN  [POGOPIN]  37.85,5.05 0 top
U$15  POGOPIN  [POGOPIN]  36.33,11.42 0 top
U$16  POGOPIN  [POGOPIN]  25.48,20.19 0 top
U$17  POGOPIN  [POGOPIN]  36.33,28.92 0 top
U$18  POGOPIN  [POGOPIN]  25.46,37.7 0 top
U$19  POGOPIN  [POGOPIN]  36.31,46.44 0 top
U$20  POGOPIN  [POGOPIN]  25.47,55.2 0 top
U$21  POGOPIN  [POGOPIN]  36.32,63.94 0 top
U$22  POGOPIN  [POGOPIN]  25.48,72.7 0 top
U$23  POGOPIN  [POGOPIN]  36.32,81.44 0 top
U$24  POGOPIN  [POGOPIN]  25.48,90.2 0 top
U$25  POGOPIN  [POGOPIN]  36.3,98.94 0 top
U$26  POGOPIN  [POGOPIN]  37.75,106.2 0 top
U$27  LOGO16-2-L  [2016-2-LOGO-L]  51.59,10.59 90 top
U$40  POGOPIN  [POGOPIN]  84.79,4.96 0 top
U$41  POGOPIN  [POGOPIN]  81.7,11.44 0 top
U$42  POGOPIN  [POGOPIN]  70.9,20.2 0 top
U$43  POGOPIN  [POGOPIN]  81.73,28.94 0 top
U$44  POGOPIN  [POGOPIN]  70.88,37.7 0 top
U$45  POGOPIN  [POGOPIN]  81.72,46.45 0 top
U$46  POGOPIN  [POGOPIN]  70.87,55.19 0 top
U$47  POGOPIN  [POGOPIN]  81.7,63.93 0 top
U$48  POGOPIN  [POGOPIN]  70.88,72.72 0 top
U$49  POGOPIN  [POGOPIN]  81.73,81.43 0 top
U$50  POGOPIN  [POGOPIN]  70.88,90.19 0 top
U$51  POGOPIN  [POGOPIN]  81.71,98.95 0 top
U$52  POGOPIN  [POGOPIN]  82.95,106.02 0 top

## Library data of the parts
1-3 = transistor-npn
C1 C2 C20 C21 C63 C64 = FSAE Electric; PARTNO: CL21B104KCC5PNC
C3 C4 C7 C9 C11 C13 C15 C17 C19 C23 C25 C27 C29 C33 C34 C37 C39 C41 C43 C45 C47 C49 C51 C53 C55 C57 C65 C66 C69 C71 C73 C75 C77 C79 C81 C83 C85 C87 C89 = FSAE Electric; PARTNO: CL10B103KC8NNNC
C5 C6 C8 C10 C12 C14 C16 C18 C22 C24 C26 C28 C35 C36 C38 C40 C42 C44 C46 C48 C50 C52 C54 C56 C67 C68 C70 C72 C74 C76 C78 C80 C82 C84 C86 C88 R1 R148 U$1-U$26 U$40-U$52 = FSAE Electric
C30-C32 C58-C61 C90-C93 = FSAE Electric; PARTNO: UMK212F105ZG-T
D1-D36 = FSAE Electric; PARTNO: LH R974-LP-1
F1-F36 = FSAE Electric; PARTNO: C2Q 750
J1 J2 = FSAE Electric; PARTNO: DF13-2P-1.25DS(20)
Q1-Q39 = FSAE Electric; PARTNO: BSS308PE H6327
R2-R6 R11 R14 R17 R20 R23 R26 R29 R35 R74 R77 R78 R83 R86 R89 R92 R95 R98 R101 R107 R110 R149-R152 R158 R161 R164 R167 R170 R173 R176 R179 R185 = FSAE Electric; PARTNO: RC0603FR-07100RL
R7 R8 R12 R15 R18 R21 R24 R27 R30 R36 R80 R87 R90 R93 R96 R99 R102 R108 R111 R154 R159 R165 R168 R171 R174 R180 = FSAE Electric; PARTNO: RC0603JR-073K3L
R9 R10 R13 R16 R19 R22 R25 R28 R31 R34 R37 R40 R81 R82 R85 R88 R91 R94 R97 R100 R103 R106 R109 R112 R156 R157 R160 R163 R166 R169 R172 R175 R178 R181 R184 R187 = FSAE Electric; PARTNO: CRCW0201475RFKED
R32 R38 R75 R76 R104 R153 R182 = FSAE Electric; PARTNO: RC0805FR-07100RL
R33 R39 R79 R84 R105 R155 R162 R177 R183 R186 = FSAE Electric; PARTNO: RC0805FR-073K3L
R41 = FSAE Electric; PARTNO: RC0805JR-070RL
R42-R65 R114-R137 R189-R212 = FSAE Electric; PARTNO: RR02J16RTB
R66 R138 R213 = FSAE Electric; PARTNO: RC0603JR-071KL
R67 R139 R214 = FSAE Electric; PARTNO: MNR14ERAPJ103
R68 R140 R215 = FSAE Electric; PARTNO: RC0603JR-07100KL
R69 R141 R216 = FSAE Electric; PARTNO: RC0603JR-071K2L
R70 R142 R217 = FSAE Electric; PARTNO: RC0805FR-07787RL
R71-R73 R143-R147 R218-R221 = FSAE Electric; PARTNO: NXFT15XH103FA1B025
R113 R188 = FSAE Electric; PARTNO: CRCW06030000Z0EA
SJ1-SJ15 = SparkFun-Passives
TX1-TX3 = FSAE Electric; PARTNO: PE-68386NLT
U1-U3 = FSAE Electric; PARTNO: LTC6804IG-2#PBF
U$27 = Pic

## Nets
A0: SJ9.2 U2.45
A1: SJ8.2 U2.46
A2: SJ7.2 U2.47
A3: SJ6.2 U2.48
A4: SJ4.2 U1.45
A5: SJ3.2 U1.46
A6: SJ2.2 U1.47
A7: SJ1.2 U1.48
A8: SJ14.2 U3.45
A9: SJ13.2 U3.46
A10: SJ12.2 U3.47
A11: SJ11.2 U3.48
C0: C55.2 C57.1 R110.2 U2.26
C1: C53.2 C55.1 C56.1 R107.2 U2.24
C2: C51.2 C53.1 C54.1 R104.2 U2.22
C3: C49.2 C51.1 C52.1 R101.2 U2.20
C4: C47.2 C49.1 C50.1 R98.2 U2.18
C5: C43.2 C47.1 C48.1 R92.2 U2.16
C6: C43.1 C44.1 C45.2 R95.2 U2.14
C7: C41.2 C45.1 C46.1 R89.2 U2.12
C8: C39.2 C41.1 C42.1 R86.2 U2.10
C9: C37.2 C39.1 C40.1 R83.2 U2.8
C10: C34.2 C37.1 C38.1 R77.2 U2.6
C11: C33.2 C34.1 C36.1 R78.2 U2.4
C12: C33.1 C35.1 R76.2 U2.2
C13: C3.1 C5.1 R4.2 U1.2
C14: C3.2 C4.1 C6.1 R6.2 U1.4
C15: C7.2 C9.1 C10.1 R11.2 U1.8
C16: C11.2 C15.1 C16.1 R17.2 U1.12
C17: C13.1 C14.1 C15.2 R23.2 U1.14
C18: C13.2 C17.1 C18.1 R20.2 U1.16
C19: C19.2 C23.1 C24.1 R29.2 U1.20
C20: C23.2 C25.1 C26.1 R32.2 U1.22
C21: C25.2 C27.1 C28.1 R35.2 U1.24
C22: C4.2 C7.1 C8.1 R5.2 U1.6
C23: C27.2 C29.1 R38.2 U1.26
C24: C17.2 C19.1 C22.1 R26.2 U1.18
C25: C9.2 C11.1 C12.1 R14.2 U1.10
C26: C65.1 C67.1 R151.2 U3.2
C27: C65.2 C66.1 C68.1 R153.2 U3.4
C28: C69.2 C71.1 C72.1 R158.2 U3.8
C29: C73.2 C77.1 C78.1 R164.2 U3.12
C30: C75.1 C76.1 C77.2 R170.2 U3.14
C31: C75.2 C79.1 C80.1 R167.2 U3.16
C32: C81.2 C83.1 C84.1 R176.2 U3.20
C33: C83.2 C85.1 C86.1 R179.2 U3.22
C34: C85.2 C87.1 C88.1 R182.2 U3.24
C35: C66.2 C69.1 C70.1 R152.2 U3.6
C36: C87.2 C89.1 R185.2 U3.26
C37: C79.2 C81.1 C82.1 R173.2 U3.18
C38: C71.2 C73.1 C74.1 R161.2 U3.10
DRIVE: 1.B U2.38
DRIVE1: 2.B U1.38
DRIVE2: 3.B U3.38
GND: C63.2 C64.2 C67.2 C68.2 C70.2 C72.2 C74.2 C76.2 C78.2 C80.2 C82.2 C84.2 C86.2 C88.2 C89.2 C90.2 C91.2 C92.2 C93.2 R188.2 R217.1 R218.P$1 R219.P$1 R220.P$1 R221.P$1 SJ11.3 SJ12.3 SJ13.3 SJ14.3 U3.30 U3.31
GNDA: C20.2 C21.2 C35.2 C36.2 C38.2 C40.2 C42.2 C44.2 C46.2 C48.2 C50.2 C52.2 C54.2 C56.2 C57.2 C58.2 C59.2 C60.2 C61.2 R113.2 R142.1 R143.P$1 R144.P$1 R145.P$1 R146.P$1 SJ6.3 SJ7.3 SJ8.3 SJ9.3 U2.30 U2.31
GNDI: C1.2 C2.2 C5.2 C6.2 C8.2 C10.2 C12.2 C14.2 C16.2 C18.2 C22.2 C24.2 C26.2 C28.2 C29.2 C30.2 C31.2 C32.2 R41.2 R70.1 R71.P$1 R72.P$1 R73.P$1 R147.P$1 SJ1.3 SJ2.3 SJ3.3 SJ4.3 U1.30 U1.31
GPIO1: R139.1 R143.P$2 U2.27
GPIO2: R139.2 R144.P$2 U2.28
GPIO3: R139.3 R145.P$2 U2.29
GPIO4: R139.4 R146.P$2 U2.32
GPIO5: R138.2 U2.33
GPIO6: R67.2 R72.P$2 U1.28
GPIO7: R67.1 R71.P$2 U1.27
GPIO8: R67.4 R147.P$2 U1.32
GPIO9: R67.3 R73.P$2 U1.29
GPIO10: R66.2 U1.33
GPIO11: R214.2 R219.P$2 U3.28
GPIO12: R214.1 R218.P$2 U3.27
GPIO13: R214.4 R221.P$2 U3.32
GPIO14: R214.3 R220.P$2 U3.29
GPIO15: R213.2 U3.33
IBIAS: R141.2 U2.44
IBIAS1: R69.2 U1.44
IBIAS2: R216.2 U3.44
ICMP: R141.1 R142.2 U2.43
ICMP1: R69.1 R70.2 U1.43
ICMP2: R216.1 R217.2 U3.43
IMA: TX1.3 U2.41
IMA1: R148.2 TX2.3 U1.41
IMA2: R1.2 TX3.3 U3.41
IPA: TX1.1 U2.42
IPA1: R148.1 TX2.1 U1.42
IPA2: R1.1 TX3.1 U3.42
N$1: Q12.1 R7.1
N$2: D1.A Q12.2 R64.P$2 R65.P$2
N$3: D1.C R9.2
N$4: F26.2 Q11.3 R6.1 R9.1 R64.P$1 R65.P$1
N$5: Q11.1 R8.1
N$6: D2.A Q11.2 R62.P$2 R63.P$2
N$7: D2.C R10.2
N$8: F27.2 Q10.3 R5.1 R10.1 R62.P$1 R63.P$1
N$9: Q10.1 R12.1
N$10: D3.A Q10.2 R60.P$2 R61.P$2
N$11: D3.C R13.2
N$12: F28.2 Q9.3 R11.1 R13.1 R60.P$1 R61.P$1
N$13: Q9.1 R15.1
N$14: D4.A Q9.2 R58.P$2 R59.P$2
N$15: D4.C R16.2
N$16: F29.2 Q8.3 R14.1 R16.1 R58.P$1 R59.P$1
N$17: Q8.1 R18.1
N$18: D5.A Q8.2 R56.P$2 R57.P$2
N$19: D5.C R19.2
N$20: Q6.1 R21.1
N$21: D6.A Q6.2 R52.P$2 R53.P$2
N$22: D6.C R22.2
N$23: F30.2 Q7.3 R17.1 R19.1 R56.P$1 R57.P$1
N$24: Q7.1 R24.1
N$25: D7.A Q7.2 R54.P$2 R55.P$2
N$26: D7.C R25.2
N$27: F31.2 Q6.3 R23.1 R25.1 R54.P$1 R55.P$1
N$28: F32.2 Q5.3 R20.1 R22.1 R52.P$1 R53.P$1
N$29: Q5.1 R27.1
N$30: D9.A Q5.2 R50.P$2 R51.P$2
N$31: D9.C R28.2
N$32: F33.2 Q4.3 R26.1 R28.1 R50.P$1 R51.P$1
N$33: Q4.1 R30.1
N$34: D10.A Q4.2 R48.P$2 R49.P$2
N$35: D10.C R31.2
N$36: F34.2 Q2.3 R29.1 R31.1 R48.P$1 R49.P$1
N$37: Q2.1 R33.1
N$38: D11.A Q2.2 R46.P$2 R47.P$2
N$39: D11.C R34.2
N$40: F35.2 Q1.3 R32.1 R34.1 R46.P$1 R47.P$1
N$41: Q1.1 R36.1
N$42: D12.A Q1.2 R44.P$2 R45.P$2
N$43: D12.C R37.2
N$44: Q3.1 R39.1
N$45: D13.C R40.2
N$46: F25.2 Q12.3 R2.1 R3.1 R4.1
N$47: D13.A Q3.2 R42.P$2 R43.P$2
N$48: R38.1 R40.1 R41.1 R42.P$1 R43.P$1 U$1.1
N$49: F36.2 Q3.3 R35.1 R37.1 R44.P$1 R45.P$1
N$50: 2.C C2.1 R2.2
N$52: Q13.2 R67.5 R67.6 R67.7 R67.8
N$53: Q13.1 R66.1 R68.1
N$55: Q25.1 R154.1
N$56: D25.A Q25.2 R211.P$2 R212.P$2
N$57: D25.C R156.2
N$58: F2.2 Q24.3 R153.1 R156.1 R211.P$1 R212.P$1
N$59: Q24.1 R155.1
N$60: D26.A Q24.2 R209.P$2 R210.P$2
N$61: D26.C R157.2
N$62: F3.2 Q23.3 R152.1 R157.1 R209.P$1 R210.P$1
N$63: Q23.1 R159.1
N$64: D27.A Q23.2 R207.P$2 R208.P$2
N$65: D27.C R160.2
N$66: F4.2 Q22.3 R158.1 R160.1 R207.P$1 R208.P$1
N$67: Q22.1 R162.1
N$68: D28.A Q22.2 R205.P$2 R206.P$2
N$69: D28.C R163.2
N$70: F5.2 Q21.3 R161.1 R163.1 R205.P$1 R206.P$1
N$71: Q21.1 R165.1
N$72: D29.A Q21.2 R203.P$2 R204.P$2
N$73: D29.C R166.2
N$74: Q19.1 R168.1
N$75: D30.A Q19.2 R199.P$2 R200.P$2
N$76: D30.C R169.2
N$77: F6.2 Q20.3 R164.1 R166.1 R203.P$1 R204.P$1
N$78: Q20.1 R171.1
N$79: D31.A Q20.2 R201.P$2 R202.P$2
N$80: D31.C R172.2
N$81: F7.2 Q19.3 R170.1 R172.1 R201.P$1 R202.P$1
N$82: F8.2 Q18.3 R167.1 R169.1 R199.P$1 R200.P$1
N$83: Q18.1 R174.1
N$84: D32.A Q18.2 R197.P$2 R198.P$2
N$85: D32.C R175.2
N$86: F9.2 Q17.3 R173.1 R175.1 R197.P$1 R198.P$1
N$87: Q17.1 R177.1
N$88: D33.A Q17.2 R195.P$2 R196.P$2
N$89: D33.C R178.2
N$90: F10.2 Q15.3 R176.1 R178.1 R195.P$1 R196.P$1
N$91: Q15.1 R180.1
N$92: D34.A Q15.2 R193.P$2 R194.P$2
N$93: D34.C R181.2
N$94: F11.2 Q14.3 R179.1 R181.1 R193.P$1 R194.P$1
N$95: Q14.1 R183.1
N$96: D35.A Q14.2 R191.P$2 R192.P$2
N$97: D35.C R184.2
N$98: Q16.1 R186.1
N$99: D36.C R187.2
N$100: F1.2 Q25.3 R149.1 R150.1 R151.1
N$101: D36.A Q16.2 R189.P$2 R190.P$2
N$102: Q38.1 R79.1
N$103: D8.A Q38.2 R136.P$2 R137.P$2
N$104: D8.C R81.2
N$105: R185.1 R187.1 R188.1 R189.P$1 R190.P$1 U$14.1
N$106: F12.2 Q16.3 R182.1 R184.1 R191.P$1 R192.P$1
N$107: 3.C C64.1 R149.2
N$108: F14.2 Q37.3 R78.1 R81.1 R136.P$1 R137.P$1
N$110: Q37.1 R80.1
N$111: D14.A Q37.2 R134.P$2 R135.P$2
N$112: D14.C R82.2
N$113: F15.2 Q36.3 R77.1 R82.1 R134.P$1 R135.P$1
N$114: Q26.2 R214.5 R214.6 R214.7 R214.8
N$115: Q36.1 R84.1
N$116: D15.A Q36.2 R132.P$2 R133.P$2
N$117: D15.C R85.2
N$118: F16.2 Q35.3 R83.1 R85.1 R132.P$1 R133.P$1
N$119: Q26.1 R213.1 R215.1
N$121: Q35.1 R87.1
N$122: D16.A Q35.2 R130.P$2 R131.P$2
N$123: D16.C R88.2
N$124: F17.2 Q34.3 R86.1 R88.1 R130.P$1 R131.P$1
N$125: J1.2 J2.1 TX1.6 TX2.6 TX3.6
N$126: Q34.1 R90.1
N$127: D17.A Q34.2 R128.P$2 R129.P$2
N$128: D17.C R91.2
N$129: J1.1 J2.2 TX1.4 TX2.4 TX3.4
N$130: Q32.1 R93.1
N$131: D18.A Q32.2 R124.P$2 R125.P$2
N$132: D18.C R94.2
N$133: C90.1 U3.35
N$134: F18.2 Q33.3 R89.1 R91.1 R128.P$1 R129.P$1
N$135: C30.1 U1.35
N$136: Q33.1 R96.1
N$137: D19.A Q33.2 R126.P$2 R127.P$2
N$138: D19.C R97.2
N$139: F19.2 Q32.3 R95.1 R97.1 R126.P$1 R127.P$1
N$142: F20.2 Q31.3 R92.1 R94.1 R124.P$1 R125.P$1
N$144: Q31.1 R99.1
N$145: D20.A Q31.2 R122.P$2 R123.P$2
N$146: D20.C R100.2
N$147: F21.2 Q30.3 R98.1 R100.1 R122.P$1 R123.P$1
N$149: Q30.1 R102.1
N$150: D21.A Q30.2 R120.P$2 R121.P$2
N$151: D21.C R103.2
N$152: F22.2 Q28.3 R101.1 R103.1 R120.P$1 R121.P$1
N$154: Q28.1 R105.1
N$155: D22.A Q28.2 R118.P$2 R119.P$2
N$156: D22.C R106.2
N$159: F23.2 Q27.3 R104.1 R106.1 R118.P$1 R119.P$1
N$161: Q27.1 R108.1
N$162: D23.A Q27.2 R116.P$2 R117.P$2
N$163: D23.C R109.2
N$165: Q29.1 R111.1
N$166: D24.C R112.2
N$170: F13.2 Q38.3 R74.1 R75.1 R76.1
N$175: D24.A Q29.2 R114.P$2 R115.P$2
N$176: R110.1 R112.1 R113.1 R114.P$1 R115.P$1 U$40.1
N$177: F24.2 Q29.3 R107.1 R109.1 R116.P$1 R117.P$1
N$178: 1.C C21.1 R74.2
N$192: Q39.2 R139.5 R139.6 R139.7 R139.8
N$193: Q39.1 R138.1 R140.1
N$262: F12.1 U$15.1
N$264: F11.1 U$16.1
N$286: F10.1 U$17.1
N$287: F9.1 U$18.1
N$288: F8.1 U$19.1
N$289: F7.1 U$20.1
N$290: F6.1 U$21.1
N$291: F5.1 U$22.1
N$292: F4.1 U$23.1
N$293: F3.1 U$24.1
N$294: F2.1 U$25.1
N$295: F1.1 U$26.1
N$296: F24.1 U$41.1
N$297: F23.1 U$42.1
N$298: F22.1 U$43.1
N$299: F21.1 U$44.1
N$300: F20.1 U$45.1
N$301: F19.1 U$46.1
N$302: F18.1 U$47.1
N$303: F17.1 U$48.1
N$304: F16.1 U$49.1
N$305: F15.1 U$50.1
N$306: F14.1 U$51.1
N$307: F13.1 U$52.1
N$308: F36.1 U$2.1
N$309: F35.1 U$3.1
N$310: F34.1 U$4.1
N$311: F33.1 U$5.1
N$312: F32.1 U$6.1
N$313: F31.1 U$7.1
N$314: F30.1 U$8.1
N$315: F29.1 U$9.1
N$316: F28.1 U$10.1
N$317: F27.1 U$11.1
N$318: F26.1 U$12.1
N$319: F25.1 U$13.1
S1: R111.2 U2.25
S2: R108.2 U2.23
S3: R105.2 U2.21
S4: R102.2 U2.19
S5: R99.2 U2.17
S6: R93.2 U2.15
S7: R96.2 U2.13
S8: R90.2 U2.11
S9: R87.2 U2.9
S10: R84.2 U2.7
S11: R80.2 U2.5
S12: R79.2 U2.3
S13: R7.2 U1.3
S14: R8.2 U1.5
S15: R12.2 U1.7
S16: R15.2 U1.9
S17: R18.2 U1.11
S18: R21.2 U1.15
S19: R24.2 U1.13
S20: R27.2 U1.17
S21: R30.2 U1.19
S22: R33.2 U1.21
S23: R36.2 U1.23
S24: R39.2 U1.25
S25: R154.2 U3.3
S26: R155.2 U3.5
S27: R159.2 U3.7
S28: R162.2 U3.9
S29: R165.2 U3.11
S30: R168.2 U3.15
S31: R171.2 U3.13
S32: R174.2 U3.17
S33: R177.2 U3.19
S34: R180.2 U3.21
S35: R183.2 U3.23
S36: R186.2 U3.25
SWTEN: SJ10.1 U2.36
SWTEN1: SJ5.1 U1.36
SWTEN2: SJ15.1 U3.36
V+: C20.1 R75.2 U2.1
V+1: C1.1 R3.2 U1.1
V+2: C63.1 R150.2 U3.1
VREF1: C58.1 U2.35
VREF2: C59.1 Q39.3 R140.2 U2.34
VREF4: C31.1 Q13.3 R68.2 U1.34
VREF6: C91.1 Q26.3 R215.2 U3.34
VREG: 1.E C60.1 C61.1 SJ6.1 SJ7.1 SJ8.1 SJ9.1 SJ10.2 U2.37 U2.40
VREG1: 2.E C32.1 SJ1.1 SJ2.1 SJ3.1 SJ4.1 SJ5.2 U1.37 U1.40
VREG2: 3.E C92.1 C93.1 SJ11.1 SJ12.1 SJ13.1 SJ14.1 SJ15.2 U3.37 U3.40

## Tracks (layer width: path | path; a pad name or v marks a point on that pad's centre or on a via)
A0  (via drill 0.5)
  Top 0.178: U2.45 95.71,59.59 95.25,60.05 v95.25,62.87 | v95.1,80.49 95.1,81.38 95.63,81.91 97.41,81.91 97.59,81.74 97.59,80.57 SJ9.2
  Bottom 0.178: v95.25,62.87 95.25,68.2 94.56,68.96 92.38,68.96 91.77,69.72 91.77,80.03 92.61,80.49 v95.1,80.49
A1  (via drill 0.5)
  Top 0.178: U2.46 96.84,60.09 96.52,60.4 v96.52,62.89 | v95.1,77.83 95.1,78.71 95.45,79.07 97.59,79.07 97.76,78.89 97.76,77.87 SJ8.2
  Bottom 0.178: v96.52,62.89 96.52,67.69 94.67,69.62 92.56,69.62 92.2,69.98 92.2,77.47 92.56,77.83 v95.1,77.83
A2  (via drill 0.5)
  Top 0.178: U2.47 97.94,60.59 97.76,60.76 v97.76,62.89 | v95.1,75.16 95.1,76.05 95.45,76.4 97.59,76.4 97.76,76.22 97.76,75.24 SJ7.2
  Bottom 0.178: v97.76,62.89 97.76,66.98 94.84,70.05 93.12,70.05 92.79,70.38 92.79,74.8 93.14,75.16 v95.1,75.16
A3  (via drill 0.5)
  Top 0.178: U2.48 99.37,62.53 v99.01,62.89 | v95.1,72.49 95.1,73.38 95.45,73.74 97.41,73.74 97.76,73.38 97.76,72.47 SJ6.2
  Bottom 0.178: v99.01,62.89 99.01,66.42 95.17,70.48 93.65,70.48 93.45,70.69 93.45,72.31 93.62,72.49 v95.1,72.49
A4
  Top 0.178: SJ4.2 142.38,71.18 143.18,70.38 143.18,63.3 141.81,61.93 141.81,60.33 142.42,59.72 143.87,59.72 143.94,59.64 144.1,59.64 U1.45
A5
  Top 0.178: SJ3.2 142.38,74.92 142.57,75.11 144.12,75.11 144.27,74.95 144.27,63.63 142.34,61.7 142.34,60.63 142.8,60.17 U1.46
A6
  Top 0.178: SJ2.2 142.38,76.92 142.57,77.11 144.48,77.11 144.68,76.89 144.68,63.37 144.37,63.07 144.35,63.07 142.82,61.54 142.82,60.91 143.03,60.71 144.12,60.71 U1.47
A7
  Top 0.178: U1.48 144.14,62.07 145.08,63.02 145.08,79.05 144.35,79.78 142.75,79.78 142.39,79.43 142.39,78.21 SJ1.2
A8  (via drill 0.5)
  Top 0.178: U3.45 50.33,59.37 52.15,61.06 55.35,61.06 55.98,61.72 55.98,66.09 v55.63,66.45 | v51.18,84.23 51.18,85.83 50.65,86.36 47.27,86.36 46.91,86 46.91,84.3 SJ14.2
  Bottom 0.178: v51.18,84.23 55.35,84.23 55.58,84 55.58,66.5 v55.63,66.45
A9  (via drill 0.5)
  Top 0.178: U3.46 50.29,59.87 51.89,61.44 53.37,61.44 53.72,61.82 53.82,65.02 53.29,65.56 52.6,65.56 52.43,65.73 v52.43,66.45 | v51.18,81.2 51.18,82.27 50.83,82.63 47.27,82.63 46.91,82.27 46.91,81.29 SJ13.2
  Bottom 0.178: v52.43,66.45 52.43,67.16 52.78,67.51 52.78,75.36 51.89,76.25 51.71,76.4 51,77.11 51,81.03 v51.18,81.2
A10  (via drill 0.5)
  Top 0.178: U3.47 49.9,60.37 51.16,61.67 51.16,67 51.54,67.33 53.85,67.33 54.03,67.16 v54.03,66.45 | v52.07,78.16 52.07,79.07 51.54,79.6 47.63,79.6 47.09,79.07 47.09,78.1 SJ12.2
  Bottom 0.178: v54.03,66.45 54.2,66.45 54.18,69.62 54.2,77.49 53.49,78.21 52.1,78.18 v52.07,78.16
A11
  Top 0.178: U3.48 49.68,60.87 50.77,61.88 50.77,71.65 50.11,72.31 47.8,72.31 47.27,72.85 47.27,75.27 SJ11.2
C0  (via drill 0.5)
  Top 0.178: v82.3,17.91 84.01,17.91 R110.2 | U2.26 v101.85,50.09
  Bottom 0.178: v82.3,17.91 82.3,18.26 81.94,18.62 79.45,18.62 79.1,18.97 79.1,23.06 78.96,23.2 C57.1 77.95,23.28 C55.2 84.06,25.39 84.61,24.84 84.61,23.06 85.32,22.35 89.94,22.35 90.3,22.71 90.3,48.57 90.75,49.02 101.68,49.02 102.03,49.38 102.03,49.91 v101.85,50.09
C1  (via drill 0.5)
  Top 0.178: R107.2 v85.5,23.77 87.99,23.77 88.34,24.13 88.34,49.38 88.55,49.59 U2.24
  Bottom 0.178: C56.1 77.85,26.99 C55.1 77.95,30.35 | 77.95,30.35 77.95,30.63 78.56,31.24 78.56,32.32 C53.2 | v85.5,23.77 85.5,30.17 85.14,30.53 78.13,30.53 77.95,30.35
C2  (via drill 0.5)
  Top 0.178: R104.2 v85.14,31.6 86.97,31.6 87.5,32.13 87.5,50.08 88.01,50.59 U2.22
  Bottom 0.178: C51.2 C53.1 | C54.1 78.41,34.18 C53.1 | C53.1 84.6,34.1 85.14,33.55 v85.14,31.6
C3  (via drill 0.5)
  Top 0.178: R101.2 v85.14,37.29 86.21,37.29 86.64,37.72 86.64,50.9 87.33,51.59 U2.20
  Bottom 0.178: C49.2 C51.1 | C52.1 78.41,38.09 C51.1 | C51.1 80,38.01 80.34,38.35 84.79,38.35 85.14,38 v85.14,37.29
C4  (via drill 0.5)
  Top 0.178: U2.18 86.16,52.59 85.75,52.17 85.75,48.67 85.32,48.23 v85.32,43.16 83.55,43.16 R98.2
  Bottom 0.178: C47.2 C49.1 | C50.1 78.41,42.36 C49.1 | C49.1 79.82,42.28 80.16,42.62 80.16,44.4 80.52,44.76 85.14,44.76 85.32,44.58 v85.32,43.16
C5  (via drill 0.5)
  Top 0.178: R92.2 82.71,51.16 v84.43,51.16 84.43,53.29 84.73,53.59 U2.16
  Bottom 0.178: C48.1 78.41,46.16 C47.1 C43.2 79.62,48.66 79.81,48.84 79.81,51.87 79.98,52.05 84.25,52.05 84.43,51.87 v84.43,51.16
C6  (via drill 0.5)
  Top 0.178: U2.14 92.48,54.53 84.28,54.53 83.95,54.94 v83.95,56.31 83.92,56.34 R95.2
  Bottom 0.178: C44.1 78.41,50.43 C43.1 78.31,50.53 C45.2 78.4,58.62 79.27,58.62 79.63,58.27 79.63,57.91 79.98,57.56 83.67,57.56 83.95,57.28 v83.95,56.31
C7  (via drill 0.5)
  Top 0.178: U2.12 85.87,55.59 85.5,55.96 85.5,60.94 85.14,61.29 v84.25,61.29 82.49,61.29 82.49,60.63 R89.2
  Bottom 0.178: C41.2 C45.1 | C46.1 78.28,60.39 C45.1 | C45.1 79.44,60.41 79.98,59.87 83.9,59.87 84.25,60.22 v84.25,61.29
C8  (via drill 0.5)
  Top 0.178: R86.2 v84.25,70.54 85.9,70.54 86.36,70 86.36,57 86.7,56.59 U2.10
  Bottom 0.178: C42.1 78.23,64.3 C41.1 C39.2 79.21,66.33 79.45,66.09 81.23,66.09 81.41,65.91 82.22,65.91 82.83,65.23 83.9,65.23 84.43,65.91 84.43,70.36 v84.25,70.54
C9  (via drill 0.5)
  Top 0.178: R83.2 84.23,75.84 v84.25,75.87 | v83.19,66.09 83.19,63.6 83.54,63.25 v84.07,63.25 | v87.63,58.09 88.16,57.56 92.5,57.56 U2.8
  Bottom 0.178: C40.1 78.13,68.21 C39.1 | C39.1 78.21,68.13 78.21,69.11 77.6,69.72 C37.2 77.81,76.58 78.92,76.58 79.45,77.11 83.9,77.11 84.25,76.76 v84.25,75.87 | C39.1 82.84,68.03 83.19,67.69 v83.19,66.09 | v84.07,63.25 86.92,63.25 87.45,62.71 87.45,58.27 v87.63,58.09
C10  (via drill 0.5)
  Top 0.178: R77.2 83.07,85.29 v84.79,85.29 87.05,85.29 87.66,84.68 87.66,60.22 89.07,58.59 U2.6
  Bottom 0.178: C38.1 77.49,78.6 C37.1 C34.2 80.33,80.86 81.05,80.14 84.61,80.14 85.14,80.67 85.14,84.94 v84.79,85.29
C11  (via drill 0.5)
  Top 0.178: R78.2 v84.79,90.63 87.63,90.63 88.49,89.84 88.49,60.5 89.34,59.59 U2.4
  Bottom 0.178: C36.1 77.49,82.66 C34.1 C33.2 83.17,84.93 84.79,86.54 v84.79,90.63
C12  (via drill 0.5)
  Top 0.178: v84.96,95.61 R76.2 | U2.2 89.76,60.59 89.41,60.94 v89.41,93.47
  Bottom 0.178: 74.61,86.89 C35.1 77.24,86.98 C33.1 | C33.1 77.6,96.77 78.21,97.38 84.43,97.38 84.96,96.85 v84.96,95.61 | C33.1 83.1,86.63 83.72,87.25 83.72,91.16 84.25,91.69 89.05,91.69 89.41,92.05 v89.41,93.47
C13  (via drill 0.5)
  Top 0.178: v126.57,89.56 129.95,89.56 130.3,89.92 130.3,91.15 R4.2 130.29,91.16 135.79,91.16 136.68,90.27 136.68,62.23 136.25,61.8 136.25,60.78 136.35,60.68 U1.2
  Bottom 0.178: C5.1 123.96,88.79 124.26,88.49 | 124.26,88.49 124.26,86.52 C3.1 | 124.26,88.49 126.21,88.49 126.57,88.85 v126.57,89.56
C14  (via drill 0.5)
  Top 0.178: R6.2 130.09,86 v131.9,86 134.21,86 135.43,84.94 135.43,60.2 135.95,59.68 U1.4
  Bottom 0.178: C6.1 124.36,84.72 C3.2 | C3.2 124.38,79.84 C4.1 | C3.2 131.48,84.7 131.9,85.11 v131.9,86
C15  (via drill 0.5)
  Top 0.178: R11.2 129.91,74.09 v131.72,74.09 132.79,74.09 133.71,73.33 133.63,58.22 134.17,57.68 U1.8
  Bottom 0.178: C10.1 124.71,74.1 C7.2 | C7.2 124.74,71.26 C9.1 | C7.2 126.22,74.08 126.57,73.74 126.57,73.02 126.92,72.67 131.55,72.67 131.72,72.85 v131.72,74.09
C16  (via drill 0.5)
  Top 0.178: U1.12 132.1,55.68 131.83,56.03 131.83,61.37 131.37,61.82 | v126.92,60.94 127.46,60.4 131.01,60.4 131.37,60.76 131.37,61.82 | 131.37,61.82 131.37,64.17 R17.2
  Bottom 0.178: C16.1 122.15,56.12 C15.1 C11.2 125.49,58.45 126.57,58.45 126.92,58.8 v126.92,60.94
C17  (via drill 0.5)
  Top 0.178: U1.14 131.42,54.68 130.96,55.14 130.96,56.29 130.76,56.49 130.06,56.49 R23.2 129.95,56.43 129.95,55.42 129.59,55.07 v127.1,55.07
  Bottom 0.178: C14.1 122.17,52.41 C13.1 C15.2 126.45,54.42 v127.1,55.07
C18  (via drill 0.5)
  Top 0.178: U1.16 131.46,53.68 131.01,53.32 131.01,52.22 130.84,52.05 130.3,52.05 130.12,51.87 129.81,51.87 R20.2 130.99,51.38 v131.17,51.21
  Bottom 0.178: C18.1 124.36,48.6 C17.1 124.79,48.27 124.79,49.38 125.45,50.04 C13.2 126.66,50.71 127.1,50.27 127.1,49.73 127.28,49.55 130.91,49.55 131.17,49.81 v131.17,51.21
C19  (via drill 0.5)
  Top 0.178: R29.2 130.09,38.53 v131.72,38.53 132.87,38.53 133.27,38.94 133.27,51.33 133.62,51.68 U1.20
  Bottom 0.178: C19.2 C23.1 | C24.1 125.19,39.77 C23.1 | C23.1 131.46,39.51 131.72,39.24 v131.72,38.53
C20  (via drill 0.5)
  Top 0.178: R32.2 130.09,32.84 v131.72,32.84 133.86,32.84 134.29,33.27 134.29,50.37 134.6,50.68 U1.22
  Bottom 0.178: C25.1 C23.2 | C26.1 125.37,35.8 C25.1 | C25.1 126.53,35.72 126.92,35.33 126.92,34.44 127.28,34.09 131.37,34.09 131.72,33.73 v131.72,32.84
C21  (via drill 0.5)
  Top 0.178: v130.66,28.4 130.66,26.91 R35.2 134.21,26.8 135.15,27.51 135.15,49.38 135.46,49.68 U1.24
  Bottom 0.178: C27.1 125.39,25.02 123.01,25.02 122.25,25.78 C28.1 122.29,32.13 125.15,32.13 125.45,32.44 C25.2 125.45,27.74 126.03,27.15 127.46,27.15 128.52,28.22 130.48,28.22 v130.66,28.4
C22  (via drill 0.5)
  Top 0.178: R5.2 129.96,79.07 v131.55,79.07 133.68,79.07 134.57,78.18 134.57,59.05 134.94,58.68 U1.6
  Bottom 0.178: C8.1 124.71,77.81 C4.2 | C4.2 C7.1 | C4.2 131.33,77.79 131.55,78 v131.55,79.07
C23  (via drill 0.5)
  Top 0.178: U1.26 145.15,50.18 145.24,50.09 145.24,49.02 143.28,47.07 v142.21,47.07 | v132.61,20.75 130.64,20.75 R38.2
  Bottom 0.178: C27.2 C29.1 131.99,21.37 v132.61,20.75 133.32,21.46 133.32,23.06 134.92,24.66 138.3,24.66 140.61,26.97 140.61,46.71 140.97,47.07 v142.21,47.07
C24  (via drill 0.5)
  Top 0.178: v127.28,42.8 129.77,42.8 129.95,42.98 129.95,44.23 R26.2 130.14,44.22 132.05,44.22 132.41,44.65 132.41,52.27 132.89,52.68 U1.18
  Bottom 0.178: C22.1 124.61,46.39 C17.2 124.74,45.34 125.32,44.76 125.32,43.55 C19.1 126.66,43.42 v127.28,42.8
C25  (via drill 0.5)
  Top 0.178: R14.2 129.86,69.29 131.55,69.29 131.72,69.11 v131.72,68.4 132.77,67.51 132.77,57.02 133.11,56.68 U1.10
  Bottom 0.178: C12.1 124.51,69.33 C9.2 | C9.2 124.59,62.38 125.32,61.65 125.32,60.31 C11.1 | C9.2 125.92,69.41 126.39,68.94 126.39,68.4 126.75,68.05 131.37,68.05 v131.72,68.4
C26  (via drill 0.5)
  Top 0.178: v21.13,94.72 21.23,94.82 R151.2 23.8,94.7 23.8,94 23.98,93.83 30.89,93.83 31.6,93.12 31.52,60.94 32.09,60.37 U3.2
  Bottom 0.178: C67.1 21.23,85.25 C65.1 21.13,85.36 v21.13,94.72
C27  (via drill 0.5)
  Top 0.178: R153.2 25.63,85.47 v27.36,85.47 30.25,85.47 30.68,85.11 30.68,60.22 31.39,59.37 U3.4
  Bottom 0.178: C68.1 21.29,80.63 C66.1 21.36,83.43 | 21.36,83.43 C65.2 | 21.36,83.43 22.29,83.43 22.73,83.87 22.73,84.23 23.09,84.58 27,84.58 27.36,84.94 v27.36,85.47
C28  (via drill 0.5)
  Top 0.178: R158.2 25.49,75.34 v27.18,75.34 28.19,75.34 28.96,74.57 28.96,58.65 30.24,57.37 U3.8
  Bottom 0.178: C72.1 21.23,67.17 C71.1 21.49,67.3 C69.2 26.81,74.61 27.18,74.98 v27.18,75.34
C29  (via drill 0.5)
  Top 0.178: v26.77,59.87 25.46,59.87 R164.2 | U3.12 27.74,55.37 27.2,55.91 27.2,59.44 v26.77,59.87 | 27.18,59.69 v26.77,59.87
  Bottom 0.178: C78.1 C77.1 21.23,58.41 C73.2 26.61,61.28 26.77,61.04 v26.77,59.87
C30  (via drill 0.5)
  Top 0.178: R170.2 v25.76,52.4 26.34,52.4 26.52,52.65 26.52,54 26.81,54.37 U3.14
  Bottom 0.178: C76.1 C75.1 | C75.1 C77.2 | C75.1 22.19,49.9 22.38,50.09 22.38,50.98 22.73,51.33 25.58,51.33 25.76,51.51 v25.76,52.4
C31  (via drill 0.5)
  Top 0.178: U3.16 36.58,53.34 27.61,53.34 27.38,53.11 27.38,49.2 27.2,49.02 v26.82,49.02 26.82,48.49 26.64,48.31 25.46,48.31 R167.2
  Bottom 0.178: C80.1 C79.1 C75.2 22.09,48.2 22.56,48.67 22.56,49.02 22.91,49.38 26.47,49.38 v26.82,49.02
C32  (via drill 0.5)
  Top 0.178: U3.20 29.57,51.37 29.18,50.9 29.18,33.83 28.6,33.55 v27.89,33.55 27.89,34.62 27.71,34.8 R176.2
  Bottom 0.178: C84.1 C83.1 | C83.1 20.98,39.18 C81.2 | C83.1 22.16,32.62 22.56,33.02 22.56,33.55 22.73,33.73 27.71,33.73 v27.89,33.55
C33  (via drill 0.5)
  Top 0.178: R179.2 25.54,30 v27.36,30 29.54,30 30.05,30.28 30.05,49.84 30.58,50.37 U3.22
  Bottom 0.178: C86.1 C85.1 C83.2 27.14,30.92 27.36,30.71 v27.36,30
C34  (via drill 0.5)
  Top 0.178: 25.64,24.89 R182.2 v27.18,25.02 30.18,25.02 30.94,25.48 30.94,48.77 31.46,49.37 U3.24
  Bottom 0.178: C88.1 C87.1 18.62,24.82 19,25.2 19.53,25.2 19.71,25.38 19.71,25.91 19.89,26.09 21.09,26.09 C85.2 26.81,26.1 27.18,25.73 v27.18,25.02
C35  (via drill 0.5)
  Top 0.178: R152.2 25.46,80.85 v27.18,80.85 29.31,80.85 29.82,80.34 29.82,59.72 30.94,58.37 U3.6
  Bottom 0.178: C70.1 C69.1 C66.2 22.34,78.85 22.91,79.43 26.82,79.43 27.18,79.78 v27.18,80.85
C36  (via drill 0.5)
  Top 0.178: R185.2 33.38,19.04 C89.1 | R185.2 28.72,19.04 v28.6,19.15 | U3.26 44.29,49.87 44.78,49.38 44.78,49.02 44.42,48.67 38.56,48.67 38.02,48.13 32.16,48.13 31.85,47.83 31.85,19.77 R185.2
  Bottom 0.178: v28.6,19.15 26.47,19.15 26.11,18.8 23.98,18.8 23.62,19.15 23.62,21.29 23.27,21.64 18.76,21.64 C87.2
C37  (via drill 0.5)
  Top 0.178: R173.2 25.59,42.98 v27.36,42.98 27.97,42.98 28.32,43.33 28.32,52.05 28.64,52.37 U3.18
  Bottom 0.178: C82.1 C81.1 21.11,41.26 C79.2 26.91,44.13 27.36,43.69 v27.36,42.98
C38  (via drill 0.5)
  Top 0.178: R161.2 25.24,67.33 v26.82,67.33 27.81,67.33 28.09,67.06 28.09,56.64 28.37,56.37 U3.10
  Bottom 0.178: C74.1 21.11,62.85 C73.1 21.36,63.11 C71.2 26.56,65.47 26.82,65.73 v26.82,67.33
DRIVE  (via drill 0.5)
  Top 0.178: U2.38 97.81,56.09 v97.41,56.49 | v104.14,63.27 102.33,63.27 1.B
  Bottom 0.178: v97.41,56.49 97.41,57.02 97.59,57.2 104.34,57.2 104.7,57.56 104.7,63.25 v104.14,63.27
DRIVE1  (via drill 0.3)
  Top 0.178: U1.38 141.99,56.18 140.89,57.28 v140.67,57.28
  Bottom 0.178: v140.67,57.28 140.67,65.66 141.73,66.73 2.B
DRIVE2
  Top 0.178: U3.38 40.78,55.87 40.34,56.31 40.34,59.16 40.51,59.33 40.69,59.33 40.87,59.51 40.87,60.4 42.11,61.65 42.65,61.65 43.54,62.54 46.25,62.54 46.94,62.92 46.94,66.61 3.B 46.89,66.86
GND  (via drill 0.5)
  Top 0.178: U3.30 v46.56,51.87 | C90.2 52.33,54.04 52.4,53.98
  other vias: 19.89,37.29 43.84,43.31 45.95,64.52 50.44,73.79 52.4,62.33 39.55,50.44 34.26,46.89 45.64,57.45 36.91,62.13 41.48,54.71 35.48,71.37 41.78,71.07 51.05,46.36 49.94,70.74
  pour Bottom: 0.15,0.13 0.15,111.38 53.14,112.37 53.29,-0.71
  pour Top (rank 6): 0.15,0.13 53.29,-0.51 53.06,111.35 0.15,111.38
GNDA  (via drill 0.5)
  Top 0.178: R144.P$1 80.21,62.65 78.94,61.47 74.83,61.47 v73.94,62.36 | U2.31 v97.24,52.59 v97.23,52.58
  other vias: 99.72,42.04 96.52,55.55 104.34,68.02 96.67,70.89 93.9,62.81
  pour Bottom: 59.84,114.43 105.56,114.43 105.56,-3.68 59.84,-3.68
  pour Top: 59.84,111.89 105.56,111.89 105.56,-1.14 59.84,-1.14
GNDI  (via drill 0.5, 0.6)
  Top 0.178: U1.31 142.11,52.68
  other vias: 133.76,18.41 127.41,18.41 136.8,44.58 126.64,94.36 138.3,73.56 141.15,52.76 134.92,89.92 139.6,79.68 132.13,93.5 141.99,33.6 133.25,87.3 138.18,27.25 128.45,61.39 130.48,63.17